# Altium PCB ASCII-gpbb-pvt1.PcbDoc (part 2 of 2)
Units mm, origin at the board's own origin, x right, y up, seen from the top; angles counter-clockwise.
Board outline 65.1 x 57.9 mm, 2 copper layers (Top Layer, Bottom Layer); 52 components, 106 nets, 1112 pads, 130 vias.
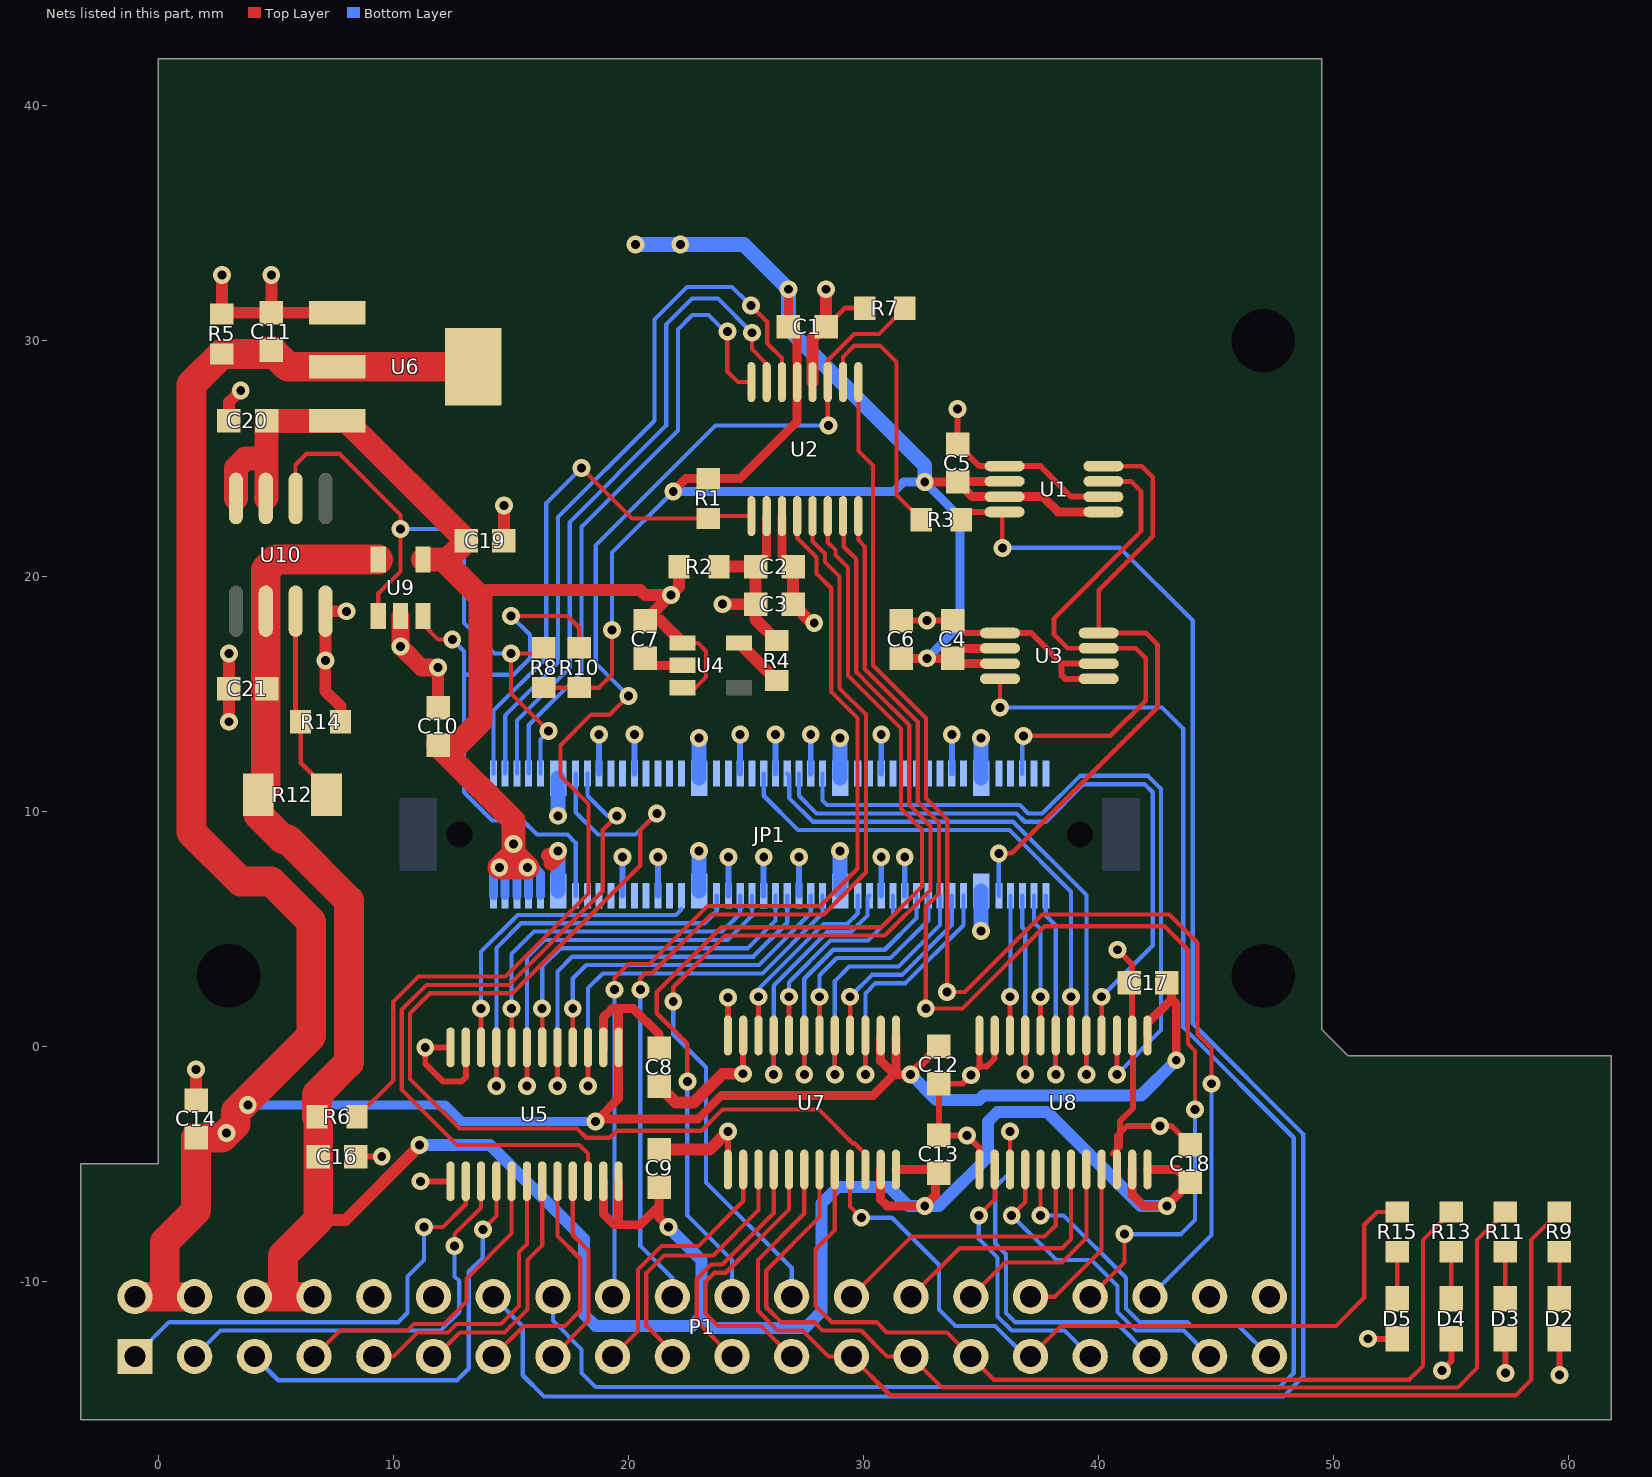
[diagram p2: the nets of this part, all layers, seen from the top]

## Via types
v1: diameter 0.762, hole 0.381, Top Layer to Bottom Layer, tented top, 102 vias
v2: diameter 0.762, hole 0.381, Top Layer to Bottom Layer, tented bottom, 28 vias

## Nets (pads, with @x,y where several pads share a name; then routed paths per layer and width w, separated by ;. In a path a pad name is that pad's centre, name@x,y a point inside that pad or via, vN(x,y) a via of type N, cw(c..) or ccw(c..) an arc to the next point about the centre after c; other vN are vias at no path point)
ADC_VA: C2.1 C3.1 R2.1 R4.1 U2.2 | length 8.8
  Top Layer w0.381: C2.1@25.4,20.4 25.875,20.875 U2.2@25.875,22.55
  Top Layer w0.508: R2.1@23.85,20.4 C2.1@25.4,20.4 C3.1@25.4,18.8 ; v1(24,18.8) C3.1@25.4,18.8 ; R4.1@26.3,17.25 25.4,18.15 C3.1@25.4,18.8
ANA_IN0: P1.18 U2.4 | length 41.9
  Top Layer w0.178: v1(19.4,2.4) 19.4,2.9 20,3.5 20.897,3.5 23.353,5.956 28.156,5.956 29.744,7.544 29.744,13.953 28.699,14.999 28.622,15.075 28.622,19.478 28,20.1 28,20.8 27.175,21.625 U2.4@27.175,22.55
  Bottom Layer w0.178: P1.18@19.32,-10.66 19.4,-10.58 v1(19.4,2.4)
ANA_IN1: P1.20 U2.5 | length 41.9
  Top Layer w0.178: v1@20.7,2.4 v1(20.5,2.4) 20.5,2.9 20.708,3.108 21.008,3.108 23.5,5.6 28.303,5.6 30.1,7.397 30.1,14.1 28.978,15.222 28.978,19.978 28.356,20.6 28.356,20.947 27.825,21.478 U2.5@27.825,22.55
  Bottom Layer w0.178: v1(20.5,2.4) 20.5,-8.5 21.86,-9.86 P1.20@21.86,-10.66
ANA_IN2: P1.22 U2.6 | length 44.9
  Top Layer w0.178: v1(22.5,-1.5) 22.5,0.1 21.2,1.4 21.2,2.306 23.95,5.056 30.753,5.056 32.489,6.792 32.489,9.205 31.589,10.105 31.589,13.505 29.333,15.761 29.333,20.367 28.8,20.9 28.8,21.1 28.475,21.425 U2.6@28.475,22.55
  Bottom Layer w0.178: v1(22.5,-1.5) 22.5,-7.2 24.4,-9.1 P1.22@24.4,-10.66
ANA_IN3: P1.24 U2.7 | length 45.4
  Top Layer w0.178: v1(21.9,1.9) 21.9,2.503 24.097,4.7 30.9,4.7 32.844,6.644 32.844,9.353 31.944,10.253 31.944,13.653 30.299,15.299 29.689,15.908 29.689,20.711 29.156,21.244 29.156,22.519 U2.7@29.125,22.55
  Bottom Layer w0.178: v1(21.9,1.9) 21.9,0.5 23.3,-0.9 23.3,-5.8 26.94,-9.44 P1.24@26.94,-10.66
ANA_IN4: P1.34 U2.8 | length 53.8
  Top Layer w0.178: U2.8@29.775,22.55 29.775,21.525 30.044,21.256 30.044,16.056 32.3,13.8 32.3,10.4 33.2,9.5 33.2,6.497 32.644,5.942 v1(32.644,1.6) 34.2,1.6 37.7,5.1 42.8,5.1 43.8,4.1 43.8,0.1 44.1,-0.2 v1(44.1,-2.7) ; P1.34@39.64,-10.66 41.1,-9.2 v1(41.1,-8)
  Bottom Layer w0.178: v1(41.1,-8) 43.5,-8 44.1,-7.4 v1(44.1,-2.7)
ANA_IN5: P1.36 U2.9 | length 56.3
  Top Layer w0.178: U2.9@29.775,28.25 29.775,25.325 30.4,24.7 30.4,16.203 32.656,13.947 32.656,10.547 33.556,9.647 v1(33.556,2.3) ; v1@33.656,2.3 34.3,2.3 37.6,5.6 43,5.6 44.2,4.4 44.2,0.5 44.8,-0.1 v1(44.8,-1.6)
  Bottom Layer w0.178: P1.36@42.18,-10.66 44.8,-8.04 v1(44.8,-1.6)
ANA_IN6: R3.1 U2.10 | length 11
  Top Layer w0.178: U2.10@29.125,28.25 29.125,29.325 29.6,29.8 30.7,29.8 31.4,29.1 31.4,23.45 R3.1@32.45,22.4
ANA_IN7: R6.1 R7.1 U2.11 | length 52.3
  Top Layer w0.178: R6.1@8.45,-3 9.991,-1.459 9.991,1.891 11.059,2.959 14.759,2.959 18.3,6.5 18.3,10.3 17.1,11.5 17.1,12.8 18.4,14.1 19.2,14.1 v1(20,14.9) ; v1(28.5,26.4) 28.475,26.425 U2.11@28.475,28.25 28.475,29.175 29.6,30.3 30.65,30.3 R7.1@31.75,31.4
  Bottom Layer w0.178: v1(20,14.9) 18.6,16.3 18.6,21.3 23.7,26.4 v1(28.5,26.4)
DAC_A: P1.14 R3.2 U1.8 | length 84.7
  Top Layer w0.178: v1(35.9,21.2) U1.8@35.9,22.625
  Top Layer w0.254: R3.2@34.15,22.4 34.475,22.725 U1.8@36,22.725
  Bottom Layer w0.178: P1.14@14.24,-10.66 15.5,-11.92 15.5,-14 16.4,-14.9 47.866,-14.9 48.7,-14.066 48.7,-3.734 44,0.966 44,18.1 40.9,21.2 v1(35.9,21.2)
DAC_B: P1.16 U3.8 | length 73.3
  Top Layer w0.178: v1(35.8,14.4) U3.8@35.8,15.625
  Bottom Layer w0.178: P1.16@16.78,-10.66 16.78,-11.68 18,-12.9 18,-13.9 18.6,-14.5 47.7,-14.5 48.3,-13.9 48.3,-3.9 43.6,0.8 43.6,13.5 42.7,14.4 v1(35.8,14.4)
DDC_SCL: JP1.B3 U1.3 U3.3 | length 22.9
  Top Layer w0.2: v2(36.8,13.2) 40.5,13.2 42,14.7 42,16.5 41.575,16.925 U3.3@40,16.925 38.675,16.925 38.1,17.5 38.1,18.2 41.8,21.9 41.8,23.6 41.375,24.025 U1.3@40.2,24.025
  Bottom Layer w0.2: JP1.B3@36.75,11.6 v2@36.75,13.15
DDC_SDA: JP1.A5 U1.4 U3.4 | length 26.4
  Top Layer w0.2: v2(35.75,8.2) 36.3,8.2 42.5,14.4 42.5,17.1 42.025,17.575 U3.4@40,17.575 40,19.4 42.3,21.7 42.3,24.2 41.825,24.675 U1.4@40.2,24.675
  Bottom Layer w0.2: JP1.A5@35.75,6.4 v2(35.75,8.2)
DUT_F_DX0: P1.39 U8.17 | length 14.9
  Top Layer w0.178: v1(37.525,-7.2) U8.17@37.525,-5.25
  Bottom Layer w0.178: v1(37.525,-7.2) 38.5,-7.2 41.156,-9.856 41.156,-11.156 41.744,-11.744 43.767,-11.744 43.923,-11.9 45.96,-11.9 P1.39@47.26,-13.2
DUT_F_DX1: P1.27 R11.2 U7.19 | length 45.9
  Top Layer w0.178: U7.19@28.125,-5.25 28.125,-7.275 25.856,-9.544 25.856,-11.11 26.49,-11.744 27.9,-11.744 28.256,-12.1 29.9,-12.1 31,-13.2 P1.27@32.02,-13.2 33.342,-14.522 55.279,-14.522 56.1,-13.7 56.1,-8.25 R11.2@57.3,-7.05
DUT_F_DX2: P1.35 U8.15 | length 16.7
  Top Layer w0.178: U8.15@36.225,-5.25 v1(36.225,-3.625)
  Bottom Layer w0.178: v1(36.225,-3.625) 36.225,-5.375 35.6,-6 35.6,-8.397 36.056,-8.853 36.056,-11.353 36.447,-11.744 40.724,-11.744 P1.35@42.18,-13.2
DUT_F_DX3: P1.37 U8.16 | length 13.7
  Top Layer w0.178: v1(36.3,-7.2) 36.875,-6.625 U8.16@36.875,-5.25
  Bottom Layer w0.178: v1(36.3,-7.2) 38.2,-9.1 39.7,-9.1 40.8,-10.2 40.8,-11.317 41.583,-12.1 43.62,-12.1 P1.37@44.72,-13.2
DUT_F_DX11: P1.33 U8.14 | length 11.5
  Top Layer w0.178: v1(34.9,-7.2) 35.575,-6.525 U8.14@35.575,-5.25
  Bottom Layer w0.178: v1(34.9,-7.2) 34.9,-8.2 35.7,-9 35.7,-11.5 36.3,-12.1 38.54,-12.1 P1.33@39.64,-13.2
DUT_F_DX14: P1.3 U5.15 | length 18.1
  Top Layer w0.178: v1(12.6,-8.5) 12.6,-8 13.725,-6.875 U5.15@13.725,-5.75
  Bottom Layer w0.178: P1.3@1.54,-13.2 2.64,-12.1 12,-12.1 12.8,-11.3 12.8,-10 12.6,-9.8 v1(12.6,-8.5)
DUT_F_DX17: P1.21 U7.16 | length 10.2
  Top Layer w0.178: P1.21@24.4,-13.2 22.9,-11.7 22.9,-9.9 23.512,-9.288 23.987,-9.288 26.175,-7.1 U7.16@26.175,-5.25
DUT_F_DX18: P1.32 U8.21 | length 7.3
  Top Layer w0.178: P1.32@37.1,-10.66 38.14,-10.66 40.125,-8.675 U8.21@40.125,-5.25
DUT_F_LVDS0_N: P1.9 U5.18 | length 12.5
  Top Layer w0.178: P1.9@9.16,-13.2 10,-13.2 11.017,-12.183 12.317,-12.183 12.672,-11.828 14.569,-11.828 15.344,-11.053 15.344,-8.756 15.675,-8.425 U5.18@15.675,-5.75
DUT_F_LVDS0_P: P1.11 U5.19 | length 10.5
  Top Layer w0.178: P1.11@11.7,-13.2 11.803,-13.2 12.82,-12.183 14.717,-12.183 15.7,-11.2 15.7,-9.1 16.325,-8.475 U5.19@16.325,-5.75
DUT_F_LVDS4_P: P1.1 U5.14 | length 19.5
  Top Layer w0.178: v1(11.3,-7.7) 12.1,-7.7 13.075,-6.725 U5.14@13.075,-5.75
  Bottom Layer w0.178: P1.1@-1,-13.2 0.456,-11.744 10.2,-11.744 10.6,-11.344 10.6,-9.8 11.3,-9.1 v1(11.3,-7.7)
DUT_F_LVDS9_P: P1.26 U8.18 | length 12.3
  Top Layer w0.178: P1.26@29.48,-10.66 32.04,-8.1 37.7,-8.1 38.175,-7.625 U8.18@38.175,-5.25
DUT_F_LVDS11_N: P1.29 R13.2 U7.20 | length 40.6
  Top Layer w0.178: U7.20@28.775,-5.25 28.775,-7.825 27.957,-8.643 27.957,-11.057 28.644,-11.744 30.544,-11.744 30.983,-12.183 33.543,-12.183 P1.29@34.56,-13.2 35.551,-14.191 53.209,-14.191 53.8,-13.6 53.8,-8.25 R13.2@55,-7.05
DUT_F_LVDS11_P: P1.31 R15.2 U7.21 | length 33
  Top Layer w0.178: U7.21@29.425,-5.25 29.425,-6.825 v1(29.9,-7.3) ; P1.31@37.1,-13.2 38.4,-11.9 50.1,-11.9 51.3,-10.7 51.3,-7.6 51.85,-7.05 R15.2@52.7,-7.05
  Bottom Layer w0.178: v1(29.9,-7.3) 31.2,-7.3 33.2,-9.3 33.2,-11.2 33.9,-11.9 35.597,-11.9 36.897,-13.2 P1.31@37.1,-13.2
DUT_F_LVDS15_N: P1.13 U5.20 | length 10.4
  Top Layer w0.178: P1.13@14.24,-13.2 15.54,-11.9 17.3,-11.9 17.944,-11.256 17.944,-9.044 16.975,-8.075 U5.20@16.975,-5.75
DUT_F_LVDS15_P: P1.15 U5.21 | length 8.4
  Top Layer w0.178: P1.15@16.78,-13.2 18.3,-11.68 18.3,-8.7 17.625,-8.025 U5.21@17.625,-5.75
DUT_F_LVDS_CK0_N: P1.28 U8.19 | length 10.8
  Top Layer w0.178: P1.28@32.02,-10.66 34.08,-8.6 38.44,-8.6 38.825,-8.215 U8.19@38.825,-5.25
DUT_F_LVDS_CK0_P: P1.30 U8.20 | length 8.9
  Top Layer w0.178: P1.30@34.56,-10.66 36.02,-9.2 38.44,-9.2 39.475,-8.165 U8.20@39.475,-5.25
DUT_F_LVDS_CK1_N: P1.5 U5.16 | length 18.2
  Top Layer w0.178: v1(13.8,-7.8) 14.375,-7.225 U5.16@14.375,-5.75
  Bottom Layer w0.178: P1.5@4.08,-13.2 5.097,-14.217 12.7,-14.217 13.2,-13.717 13.2,-9.6 13.8,-9 v1(13.8,-7.8)
DUT_F_LVDS_CK1_P: P1.7 U5.17 | length 13.4
  Top Layer w0.178: P1.7@6.62,-13.2 7.72,-12.1 10.597,-12.1 10.869,-11.828 12.144,-11.828 13.1,-10.872 13.1,-9.9 15.025,-7.975 U5.17@15.025,-5.75
DUT_F_LVDSB_N: P1.19 U7.15 | length 11.7
  Top Layer w0.178: P1.19@21.86,-13.2 21.96,-13.1 20.756,-11.896 20.756,-9.647 21.501,-8.901 23.601,-8.901 25.525,-6.978 U7.15@25.525,-5.25
DUT_F_LVDSB_P: P1.17 U7.14 | length 11.2
  Top Layer w0.178: P1.17@19.32,-13.2 20.4,-12.12 20.4,-9.5 21.4,-8.5 22.975,-8.5 24.875,-6.6 U7.14@24.875,-5.25
DUT_F_LVDSC_N: P1.25 R9.2 U7.18 | length 49.1
  Top Layer w0.178: U7.18@27.475,-5.25 27.475,-7.125 25.5,-9.1 25.5,-11.257 26.343,-12.1 27.4,-12.1 28.5,-13.2 P1.25@29.48,-13.2 31.132,-14.852 57.748,-14.852 58.4,-14.2 58.4,-8.25 R9.2@59.6,-7.05
DUT_F_LVDSC_P: P1.23 U7.17 | length 12.3
  Top Layer w0.178: U7.17@26.825,-5.25 26.825,-6.953 24.135,-9.643 23.66,-9.643 23.256,-10.047 23.256,-11.356 23.8,-11.9 25.64,-11.9 P1.23@26.94,-13.2
F_DX0: JP1.A1 U8.7 | length 9.4
  Top Layer w0.2: v1(38.175,-1.2) U8.7@38.175,0.45
  Bottom Layer w0.178: JP1.A1@37.75,6.4 37.75,5.55 38.175,5.125 v1(38.175,-1.2)
F_DX1: JP1.A8 U7.5 | length 12.3
  Top Layer w0.2: v1(28.775,-1.2) U7.5@28.775,0.45
  Bottom Layer w0.178: v1(28.775,-1.2) 28.775,2.775 29.389,3.389 31.489,3.389 33.25,5.15 JP1.A8@33.25,6.4
F_DX2: JP1.A3 U8.9 | length 9.3
  Top Layer w0.2: v1(36.875,-1.2) U8.9@36.875,0.45
  Bottom Layer w0.178: JP1.A3@36.75,6.4 36.75,5.05 36.875,4.925 v1(36.875,-1.2)
F_DX3: JP1.A2 U8.8 | length 6.1
  Top Layer w0.2: U8.8@37.525,0.45 v1(37.525,2.1)
  Bottom Layer w0.178: JP1.A2@37.25,6.4 37.25,5.25 37.525,4.975 v1(37.525,2.1)
F_DX4: JP1.B2
F_DX5: JP1.B1
F_DX6: JP1.B39 U2.14 | length 30.9
  Top Layer w0.178: v1(25.2,31.5) 25.9,30.8 25.9,29.9 26.525,29.275 U2.14@26.525,28.25
  Bottom Layer w0.178: JP1.B39@14.75,11.6 14.75,14.064 17,16.314 17,22.507 21.1,26.607 21.1,30.907 22.493,32.3 24.4,32.3 25.054,31.646 v1@25.054,31.254
F_DX7: JP1.B37 U2.16 | length 27.2
  Top Layer w0.178: v1(24.2,30.4) 24.2,28.7 24.65,28.25 U2.16@25.225,28.25
  Bottom Layer w0.178: JP1.B37@15.75,11.6 15.75,13.65 18,15.9 18,22.093 22.1,26.193 22.1,30.493 22.707,31.1 23.4,31.1 23.954,30.546 v1@24.346,30.546
F_DX8: JP1.B6
F_DX11: JP1.A4 U8.10 | length 5.9
  Top Layer w0.2: U8.10@36.225,0.45 v1(36.225,2.1)
  Bottom Layer w0.178: v1@36.25,2.125 JP1.A4@36.25,6.4
F_DX12: JP1.B38 U2.15 | length 28.8
  Top Layer w0.178: v1(25.25,30.35) 25.25,29.65 25.875,29.025 U2.15@25.875,28.25
  Bottom Layer w0.178: JP1.B38@15.25,11.6 15.25,13.857 17.5,16.107 17.5,22.3 21.6,26.4 21.6,30.7 22.7,31.8 23.8,31.8 v1(25.25,30.35)
F_DX13: JP1.B40 R1.2 U2.1 | length 22.8
  Top Layer w0.178: v1(18,24.6) 20.15,22.45 R1.2@23.4,22.45 23.5,22.55 U2.1@25.225,22.55
  Bottom Layer w0.178: JP1.B40@14.25,11.6 14.25,14.271 16.5,16.521 16.5,23.1 v1(18,24.6) v1@18.05,24.65
F_DX14: JP1.A25 U5.9 | length 18.2
  Top Layer w0.2: v1(14.375,-1.7) U5.9@14.375,-0.05
  Bottom Layer w0.178: v1(14.375,-1.7) 14.375,4.172 15.431,5.228 23.228,5.228 23.75,5.75 JP1.A25@23.75,6.4
F_DX15: JP1.B36 R8.1 U9.1 U10.2 | length 28
  Top Layer w0.178: U10.2@5.835,23.3 5.835,24.735 6.3,25.2 7.7,25.2 10.3,22.6 v1(10.3,22) 10.3,20.2 9.35,19.25 U9.1@9.35,18.3 ; R8.1@16.4,16.95 16.15,16.7 v1(15,16.7) 15,15 v1(16.6,13.4)
  Bottom Layer w0.178: v1(10.3,22) 12.1,22 13,21.1 13,18 14.3,16.7 v1(15,16.7) ; JP1.B36@16.25,11.6 16.25,13.05 v1(16.6,13.4)
F_DX16: JP1.B10
F_DX17: JP1.A12 U7.8 | length 8.7
  Top Layer w0.2: U7.8@26.825,0.45 v1(26.825,2.1)
  Bottom Layer w0.178: v1(26.825,2.1) 26.825,2.719 28.595,4.489 30.189,4.489 31.25,5.55 JP1.A12@31.25,6.4
F_DX18: JP1.B16 U8.3 | length 31.3
  Top Layer w0.2: v1(40.775,-1.2) U8.3@40.775,0.45
  Bottom Layer w0.178: JP1.B16@28.25,11.6 28.25,10.45 28.444,10.256 36.647,10.256 37.003,9.9 37.6,9.9 39.2,11.5 42.103,11.5 42.656,10.947 42.656,0.681 v1(40.775,-1.2)
F_LVDS0_N: JP1.A20 U5.6 | length 15.2
  Top Layer w0.2: U5.6@16.325,-0.05 v1(16.325,1.6)
  Bottom Layer w0.178: v1(16.325,1.6) 16.325,3.386 17.1,4.161 25.061,4.161 26.25,5.35 JP1.A20@26.25,6.4
F_LVDS0_P: JP1.A19 U5.5 | length 18.3
  Top Layer w0.2: v1(16.975,-1.7) U5.5@16.975,-0.05
  Bottom Layer w0.178: v1(16.975,-1.7) 16.975,3.175 17.605,3.805 25.305,3.805 26.75,5.25 JP1.A19@26.75,6.4
F_LVDS1_N: JP1.A30
F_LVDS1_P: JP1.A29
F_LVDS2_N: JP1.A32
F_LVDS2_P: JP1.A33
F_LVDS3_N: JP1.B31
F_LVDS3_P: JP1.B32
F_LVDS4_N: JP1.A27
F_LVDS4_P: JP1.A26 U5.10 | length 13.3
  Top Layer w0.2: U5.10@13.725,-0.05 v1(13.725,1.6)
  Bottom Layer w0.178: v1(13.725,1.6) 13.725,4.025 15.283,5.583 22.01,5.583 22.25,5.823
F_LVDS5_N: JP1.B27
F_LVDS5_P: JP1.B26
F_LVDS6_N: JP1.B28
F_LVDS6_P: JP1.B29
F_LVDS7_N: JP1.B35 U7.22 | length 45.9
  Top Layer w0.178: v2(21.2,9.9) 20.5,9.2 20.5,7.694 15.053,2.248 11.551,2.248 10.702,1.399 10.702,-1.402 12.8,-3.5 17.8,-3.5 18.2,-3.9 19.2,-3.9 19.5,-3.6 23.1,-3.6 24,-2.7 28.1,-2.7 29.533,-4.133 29.608,-4.133 30.075,-4.6 U7.22@30.075,-5.25
  Bottom Layer w0.178: JP1.B35@17.75,11.6 17.75,9.95 18.7,9 20.3,9 v2(21.2,9.9)
F_LVDS7_P: JP1.B34 U5.22 | length 30.3
  Top Layer w0.178: U5.22@18.275,-5.75 18.275,-4.575 17.9,-4.2 12.7,-4.2 10.347,-1.847 10.347,1.547 11.403,2.603 14.906,2.603 18.9,6.597 18.9,9.2 v2(19.5,9.8)
  Bottom Layer w0.178: JP1.B34@18.25,11.6 18.25,10.65 19.1,9.8 v2(19.5,9.8)
F_LVDS8_N: JP1.B25
F_LVDS8_P: JP1.B24
F_LVDS9_N: JP1.B22
F_LVDS9_P: JP1.B21 U8.6 | length 21.8
  Top Layer w0.2: U8.6@38.825,0.45 v1(38.825,2.1)
  Bottom Layer w0.178: JP1.B21@25.75,11.6 25.75,10.65 27.211,9.189 36.205,9.189 38.825,6.569 v1(38.825,2.1)
F_LVDS10_N: JP1.B15
F_LVDS10_P: JP1.B14
F_LVDS11_N: JP1.A7 U7.4 | length 8.5
  Top Layer w0.2: U7.4@29.425,0.45 v1(29.425,2.1)
  Bottom Layer w0.178: v1(29.425,2.1) 30.358,3.033 31.636,3.033 33.75,5.147 JP1.A7@33.75,6.4
F_LVDS11_P: JP1.A6 U7.3 | length 11.7
  Top Layer w0.2: v1(30.075,-1.2) U7.3@30.075,0.45
  Bottom Layer w0.178: v1(30.075,-1.2) 30.075,2.247 30.505,2.678 31.783,2.678 34.25,5.144 JP1.A6@34.25,6.4
F_LVDS12_N: JP1.B12
F_LVDS12_P: JP1.B11
F_LVDS13_N: JP1.B9
F_LVDS13_P: JP1.B8
F_LVDS14_N: JP1.B5
F_LVDS14_P: JP1.B4
F_LVDS15_N: JP1.A17 U5.4 | length 14.9
  Top Layer w0.2: U5.4@17.625,-0.05 v1(17.625,1.6)
  Bottom Layer w0.178: v1(17.625,1.6) 17.625,2.875 18.2,3.45 25.544,3.45 27.75,5.656 JP1.A17@27.75,6.4
F_LVDS15_P: JP1.A16 U5.3 | length 17.9
  Top Layer w0.2: v1(18.275,-1.7) U5.3@18.275,-0.05
  Bottom Layer w0.178: v1(18.275,-1.7) 18.275,2.469 18.9,3.094 25.691,3.094 28.153,5.556 28.158,5.556 28.25,5.647 JP1.A16@28.25,6.4
F_LVDS_CK0_N: JP1.B19 U8.5 | length 24.7
  Top Layer w0.2: v1(39.475,-1.2) U8.5@39.475,0.45
  Bottom Layer w0.178: JP1.B19@26.75,11.6 26.833,11.517 26.833,10.564 27.853,9.544 36.353,9.544 39.475,6.422 v1(39.475,-1.2)
F_LVDS_CK0_P: JP1.B18 U8.4 | length 28.5
  Top Layer w0.2: U8.4@40.125,0.45 v1(40.125,2.1)
  Bottom Layer w0.178: JP1.B18@27.25,11.6 27.25,10.65 28,9.9 36.5,9.9 36.856,9.544 37.747,9.544 39.347,11.144 41.956,11.144 42.3,10.8 42.3,4.275 v1(40.125,2.1)
F_LVDS_CK1_N: JP1.A23 U5.8 | length 15.2
  Top Layer w0.2: U5.8@15.025,-0.05 v1(15.025,1.6)
  Bottom Layer w0.178: v1(15.025,1.6) 15.025,3.925 15.972,4.872 23.972,4.872 24.75,5.65 JP1.A23@24.75,6.4
F_LVDS_CK1_P: JP1.A22 U5.7 | length 18.3
  Top Layer w0.2: v1(15.675,-1.7) U5.7@15.675,-0.05
  Bottom Layer w0.178: v1(15.675,-1.7) 15.675,3.775 16.416,4.516 24.216,4.516 25.25,5.55 JP1.A22@25.25,6.4
F_LVDSA_N: JP1.A35 R10.1 U9.3 | length 25.6
  Top Layer w0.178: U9.3@11.25,18.3 11.25,17.95 11.9,17.3 v1(12.5,17.3) ; v1(15,18.3) 17.4,18.3 17.9,17.8 R10.1@17.9,16.95
  Bottom Layer w0.178: v1(12.5,17.3) 13,16.8 13,15.8 ; v1(15,18.3) 15.8,17.5 15.8,16.5 15.1,15.8 13,15.8 ; JP1.A35@17.75,6.4 17.75,8.65 17.4,9 16.1,9 15.5,9.6 14.2,9.6 13,10.8 13,15.8
F_LVDSA_P: JP1.A34
F_LVDSB_N: JP1.A14 U7.9 | length 11.5
  Top Layer w0.2: v1(26.175,-1.2) U7.9@26.175,0.45
  Bottom Layer w0.178: v1(26.175,-1.2) 26.175,2.572 28.447,4.844 29.447,4.844 30.167,5.564 30.167,6.317 JP1.A14@30.25,6.4
F_LVDSB_P: JP1.A15 U7.10 | length 8.3
  Top Layer w0.2: U7.10@25.525,0.45 v1(25.525,2.1)
  Bottom Layer w0.178: v1(25.525,2.1) 25.525,2.425 28.3,5.2 29.3,5.2 29.75,5.65 JP1.A15@29.75,6.4
F_LVDSC_N: JP1.A9 U7.6 | length 9.2
  Top Layer w0.2: U7.6@28.125,0.45 v1(28.125,2.1)
  Bottom Layer w0.178: v1(28.125,2.1) 28.125,3.013 28.856,3.744 31.144,3.744 32.75,5.35 JP1.A9@32.75,6.4
F_LVDSC_P: JP1.A10 U7.7 | length 12.5
  Top Layer w0.2: v1(27.475,-1.2) U7.7@27.475,0.45
  Bottom Layer w0.178: v1(27.475,-1.2) 27.475,2.866 28.709,4.1 30.9,4.1 32.25,5.45 JP1.A10@32.25,6.4
GND: C1.2 C2.2 C3.2 C4.2 C5.2 C6.2 C7.2 C8.2 C9.2 C10.2 C11.2 C12.2 C13.2 C14.2 C16.2 C17.2 C18.2 C19.2 C20.2 C21.2 D2.2 D3.2 D4.2 D5.2 JP1.A11 JP1.A13 JP1.A18 JP1.A21 JP1.A24 JP1.A28 JP1.A31 JP1.B7 JP1.B13 JP1.B17 JP1.B20 JP1.B23 JP1.B30 JP1.B33 JP1.GND1 JP1.GND2 JP1.GND3 JP1.GND4 JP1.GND5 JP1.GND6 JP1.GND7 JP1.GND8 P1.10 P1.12 P1.38 P1.40 R5.2 R7.2 R14.1 U1.2 U1.5 U2.3 U2.12 U3.1 U3.2 U3.5 U4.2 U5.11 U5.12 U5.13 U6.1 U7.11 U7.12 U7.13 U8.2 U8.11 U8.12 U8.13 U8.22 U9.2 U10.8 | length 146.3
  Top Layer w0.2: C1.2@28.4,30.6 29.2,31.4 R7.2@30.05,31.4
  Top Layer w0.254: C16.2@8.4,-4.7 v1(9.5,-4.7) ; v1(11.15,-5.75) U5.13@12.425,-5.75 ; U5.12@12.425,-0.05 v1(11.35,-0.05) 11.35,-0.75 12.1,-1.5 12.9,-1.5 13.075,-1.325 U5.11@13.075,-0.05 ; U7.13@24.225,-5.25 v1(24.225,-3.625) ; U7.12@24.225,0.45 v1(24.225,2.075) ; v1(24.875,-1.175) U7.11@24.875,0.45 ; C6.2@31.9,18.1 C4.2@33.8,18.1 34.325,17.575 U3.5@35.8,17.575 37.125,17.575 38.425,16.275 ; v1(34,27.1) C5.2@34,25.6 34.925,24.675 U1.5@36,24.675 37.525,24.675 38.825,23.375 U1.2@40.2,23.375 ; U8.13@34.925,-5.25 34.925,-4.325 v1(34.4,-3.8) C13.2@33.2,-3.8 C12.2@33.2,-1.6 34.2,-1.6 34.925,-0.875 ; U8.12@34.925,0.45 34.925,-0.875 ; U8.11@35.575,0.45 35.575,-0.525 35.225,-0.875 34.925,-0.875 ; U3.1@40,15.625 38.575,15.625 38.425,15.775 38.425,16.275 ; U3.2@40,16.275 38.425,16.275 ; U8.22@40.605,-4.575 U8.22@40.775,-4.405 ; U8.22@40.775,-5.25 U8.22@40.775,-4.405 ; v1(40.8,4.1) 41.425,3.475 U8.2@41.425,0.45 41.461,0.414 41.461,-2.639 40.9,-3.2 40.9,-3.7 ; C18.2@43.9,-4.2 43.1,-3.4 v1(42.6,-3.4) 41.2,-3.4 40.9,-3.7 ; v1(51.45,-12.45) D5.2@52.7,-12.45 ; v1(54.6,-13.8) 55,-13.4 D4.2@55,-12.45 ; v1@57.3,-13.7 D3.2@57.3,-12.45 ; v1(59.6,-14) D2.2@59.6,-12.45 ; U8.22@40.775,-4.405 40.775,-3.825 40.9,-3.7 ; U8.22@40.775,-4.405 40.9,-4.28 40.9,-3.7
  Top Layer w0.381: C7.2@21,16.2 U4.2@22.3,16.2 ; U2.3@26.525,22.55 26.525,20.875 C2.2@27,20.4
  Top Layer w0.5: v1(3,13.8) v1(3,16.7) ; C20.2@3,26.6 3,27.4 v1(3.5,27.9) ; R14.1@7.75,13.8 7.75,14.45 7.1,15.1 7.1,16.4 v1(7.105,16.405) U10.8@7.105,18.5 v1(8,18.5) ; C19.2@14.7,21.5 v1(14.7,23)
  Top Layer w0.508: C14.2@1.6,-2.3 v1(1.6,-1) ; v1(2.7,32.8) R5.2@2.7,31.15 2.75,31.2 U6.1@7.6,31.2 ; C11.2@4.8,31.2 v1(4.8,32.8) ; C10.2@11.9,14.4 v1(11.9,16.1) ; C9.2@21.3,-4.4 23.45,-4.4 v1(24.225,-3.625) ; C8.2@21.3,-1.7 22,-2.4 22.773,-2.4 23.998,-1.175 v1(24.875,-1.175) ; C2.2@27,20.4 C3.2@27,18.8 27.8,18 v1(27.9,18) ; U2.12@27.825,28.25 27.825,30.125 C1.2@28.3,30.6 ; C1.2@28.4,30.6 v1(28.4,32.2)
  Top Layer w0.635: 16.6,8.119 16.819,8.119 v2(17,8.3) 17,8.076 16.703,7.779
  Top Layer w0.762: U9.2@10.3,18.3 v1(10.3,17) 11.2,16.1 v1(11.9,16.1)
  Bottom Layer w0.254: JP1.B33@18.75,11.6 v2(18.75,13.25) ; JP1.A31@19.75,6.4 v2(19.75,8.05) ; JP1.B30@20.25,11.6 v2(20.25,13.25) ; JP1.A28@21.25,6.4 v2(21.25,8.05) ; JP1.A24@24.25,6.4 v2(24.25,8.05) ; JP1.B23@24.75,11.6 v2(24.75,13.25) ; JP1.A21@25.75,6.4 v2(25.75,8.05) ; JP1.B20@26.25,11.6 v2(26.25,13.25) ; JP1.A18@27.25,6.4 v2(27.25,8.05) ; JP1.B17@27.75,11.6 v2(27.75,13.25) ; JP1.A13@30.75,6.4 v2(30.75,8.05) ; JP1.B13@30.75,11.6 v2(30.75,13.25) ; JP1.A11@31.75,6.4 v2(31.75,8.05) ; JP1.B7@33.75,11.6 v2(33.75,13.25)
  Bottom Layer w0.635: JP1.GND4@17,6.6 v2(17,8.3) ; v2(17,9.8) JP1.GND8@17,11.4 ; JP1.GND3@23,6.6 v2(23,8.3) ; JP1.GND7@23,11.4 v2(23,13.1) ; JP1.GND2@29,6.6 v2(29,8.3) ; JP1.GND6@29,11.4 v2(29,13.1) ; v1(35,4.9) JP1.GND1@35,6.6 ; JP1.GND5@35,11.4 v2(35,13.1)
  other v1: 57.3,-13.9 34.562,-1.238 32.7,18.1
NetD2_1: D2.1 R9.1 | length 2
  Top Layer w0.178: D2.1@59.6,-10.75 R9.1@59.6,-8.75
NetD3_1: D3.1 R11.1 | length 2
  Top Layer w0.178: D3.1@57.3,-10.75 R11.1@57.3,-8.75
NetD4_1: D4.1 R13.1 | length 2
  Top Layer w0.178: D4.1@55,-10.75 R13.1@55,-8.75
NetD5_1: D5.1 R15.1 | length 2
  Top Layer w0.178: D5.1@52.7,-10.75 R15.1@52.7,-8.75
NetR4_2: R4.2 U4.5 | length 2.3
  Top Layer w0.508: U4.5@24.7,17.15 R4.2@26.3,15.55
NetR12_2: R12.2 R14.2 U10.7 | length 8.3
  Top Layer w0.203: U10.7@5.835,18.5 5.835,14.015 R14.2@6.05,13.8 6.05,12.05 7.15,10.95 R12.2@7.15,10.7
P3.3V: C1.1 C4.1 C5.1 C6.1 C8.1 C11.1 C12.1 C14.1 C17.1 P1.2 P1.4 R1.1 R5.1 R8.2 R10.2 U1.1 U1.6 U1.7 U2.13 U3.6 U3.7 U5.1 U5.2 U6.2 U6.4 U7.1 U7.2 U8.1 | length 202.3
  Top Layer w0.178: R8.2@16.4,15.25 R10.2@17.9,15.25 18.75,15.25 19.3,15.8 v1(19.3,17.7)
  Top Layer w0.381: v1(18.6,-3.2) v1@18.7,-3.1 ; U5.2@18.925,-0.05 18.925,1.225 19.3,1.6 19.6,1.6 ; C8.1@21.3,-0.1 21.3,0.5 20.2,1.6 19.6,1.6 ; v1(21.9,23.6) 22.45,24.15 R1.1@23.4,24.15 24.75,24.15 27.175,26.575 U2.13@27.175,28.25 27.175,30.125 C1.1@26.7,30.6 ; C1.1@26.8,30.6 v1(26.8,32.2) ; U7.2@30.725,0.45 30.725,-0.625 31.3,-1.2 ; U7.1@31.375,0.45 31.375,-1.125 31.3,-1.2 ; C6.1@31.9,16.5 C4.1@33.8,16.5 ; v1(32.6,24) C5.1@34,24 ; C12.1@33.2,0 v1(32,-1.2) 31.3,-1.2 ; U3.7@35.8,16.275 34.025,16.275 C4.1@33.8,16.5 ; U3.6@35.8,16.925 34.225,16.925 C4.1@33.8,16.5 ; U1.6@36,24.025 34.025,24.025 C5.1@34,24 ; U1.1@40.2,22.725 38.275,22.725 37.625,23.375 U1.7@36,23.375 34.625,23.375 C5.1@34,24 ; U8.1@42.075,0.45 42.075,0.975 43.1,2 ; C17.1@43.1,2.7 43.1,2 ; v1(43.3,-0.6) 43.3,1.8 43.1,2 ; v1@18.7,-3.1 19.575,-2.225 U5.1@19.575,-0.05 19.575,1.575 19.6,1.6 ; v1@18.7,-3.1 22.953,-3.1 23.953,-2.1 30.4,-2.1 31.3,-1.2
  Top Layer w1.27: P1.2@-1,-10.66 0.27,-10.66 ; P1.4@1.54,-10.66 0.27,-10.66 ; U6.4@13.4,28.9 U6.2@7.6,28.9 5.5,28.9 C11.1@4.8,29.6 4.65,29.45 R5.1@2.7,29.45 1.4,28.15 1.4,9.1 3.5,7 4.8,7 6.5,5.3 6.5,0.426 3.287,-2.787 3.287,-3.313 2.7,-3.9 C14.1@1.6,-3.9 1.6,-7 0.27,-8.33 0.27,-10.66
  Bottom Layer w0.178: v1(19.3,17.7) 19.3,21 v1(21.9,23.6)
  Bottom Layer w0.381: v1(2.9,-3.7) 2.9,-3.4 v1(3.8,-2.5) 12.2,-2.5 12.9,-3.2 v1(18.6,-3.2) ; v1(21.9,23.6) 31.3,23.6 31.7,24 v1(32.6,24) 34.1,22.5 34.1,17.9 v1(32.7,16.5)
  Bottom Layer w0.508: v1(32,-1.2) 33.1,-2.3 34.9,-2.3 35.1,-2.1 41.8,-2.1 v1(43.3,-0.6)
  Bottom Layer w0.635: v1(20.3,34.1) v1(22.2,34.1) 24.9,34.1 v1(26.8,32.2) 26.8,30.5 32.6,24.7 v1(32.6,24)
P5.0V_MAIN: C7.1 C10.1 C19.1 C20.1 JP1.A36 JP1.A37 JP1.A38 JP1.A39 JP1.A40 R2.2 U4.1 U4.3 U6.3 U9.4 U10.3 U10.4 | length 62.6
  Top Layer w0.178: U4.3@22.3,15.25 22.85,15.25 23.3,15.7 23.3,16.8 22.95,17.15 U4.1@22.3,17.15
  Top Layer w0.508: 13.7,19.1 14,19.4 20.5,19.4 20.7,19.2 v1(21.8,19.2) ; R2.2@22.15,20.4 22.15,19.55 v1(21.8,19.2) ; U4.1@22.3,17.15 21.35,18.1 C7.1@20.7,18.1 v1(21.8,19.2)
  Top Layer w1.016: U10.4@3.295,23.3 3.295,24.595 3.7,25 4.6,25 ; U10.3@4.565,23.3 4.6,23.335 4.6,25 ; U9.4@11.25,20.7 12.1,20.7 ; C10.1@11.9,12.8 12.7,12.8 13.7,13.8 13.7,19.1 12.1,20.7 ; C10.1@12.05,12.65 15.1,9.6 v2(15.1,8.6) 15.1,8.2 ; 4.6,25 C20.1@4.6,26.6 U6.3@7.6,26.6 8,26.6 C19.1@13.1,21.5 12.3,20.7 12.1,20.7 ; 15.1,8.2 v2(14.5,7.6) v2(15.7,7.6) 15.1,8.2
  Bottom Layer w0.381: JP1.A40@14.25,6.4 14.25,7.35 v2(14.5,7.6) 15.2,7.6 ; JP1.A39@14.75,6.4 v2@14.75,7.55 ; v2(15.1,8.6) 15.1,7.7 15.2,7.6 ; JP1.A38@15.25,6.4 15.25,7.55 15.2,7.6 ; JP1.A37@15.75,6.4 15.75,7.55 v2(15.7,7.6) ; JP1.A36@16.25,6.4 16.25,7.35 16,7.6 v2(15.7,7.6) ; 15.2,7.6 v2(15.7,7.6)
P_DUT: C9.1 C13.1 C16.1 C18.1 C21.1 P1.6 P1.8 R6.2 R12.1 U5.23 U5.24 U7.23 U7.24 U8.23 U8.24 U9.5 U10.6 | length 119.4
  Top Layer w0.381: U5.23@18.925,-5.75 18.925,-7.125 19.4,-7.6 19.7,-7.6 ; U5.24@19.575,-5.75 19.575,-7.475 19.7,-7.6 ; C9.1@21.3,-6 21.3,-6.8 ; v1(21.7,-7.7) 21.3,-7.3 21.3,-6.8 ; U7.23@30.725,-5.25 30.725,-6.525 31,-6.8 v1(32.6,-6.8) 33.05,-6.35 33.05,-5.25 U7.24@31.375,-5.25 ; U8.23@41.425,-5.25 41.425,-6.325 41.9,-6.8 v1(42.9,-6.8) C18.1@43.9,-5.8 43.35,-5.25 U8.24@42.075,-5.25 ; 19.7,-7.6 20.5,-7.6 21.3,-6.8
  Top Layer w0.508: 6.8,-7.4 7.949,-7.4 11.1,-4.249 v1(11.1,-4.2)
  Top Layer w1.27: P1.6@4.08,-10.66 5.3,-10.66 ; P1.8@6.62,-10.66 5.3,-10.66 ; U9.5@9.35,20.7 5,20.7 4.565,20.265 U10.6@4.565,18.5 4.565,11.015 R12.1@4.25,10.7 4.25,9.85 5.3,8.8 5.5,8.8 8.1,6.2 8.1,-0.7 6.75,-2.05 R6.2@6.75,-3 6.8,-3.05 C16.1@6.8,-4.7 6.8,-7.4 5.3,-8.9 5.3,-10.66
  Bottom Layer w0.508: v1(11.1,-4.2) 14.1,-4.2 18.1,-8.2 18.1,-11.4 18.6,-11.9 22.7,-11.9 23.1,-11.5 ; v1(21.7,-7.7) 23.1,-9.1 23.1,-11.5 ; v1(42.9,-6.8) 41.8,-6.8 37.8,-2.8 35.7,-2.8 35.3,-3.2 35.3,-4.7 33.2,-6.8 v1(32.6,-6.8) 31.9,-6.8 31.1,-6 28.9,-6 28.2,-6.7 28.2,-11.3 27.5,-12 23.6,-12 23.1,-11.5
pads on no net: JP1.0 NTLOGO.0 U4.4 U10.1 U10.5

## Polygon pours and split planes (outlines as drawn)
GND on Top Layer "gnd" (solid, remove dead copper, pour order 9): -4.2,-18.2 62.3,-19.1 65.9,-11.5 52.9,41.9 50.2,44.6 -0.6,44.6 -6.6,38.6 -6.6,-12.2
P_DUT on Top Layer "gnd" (solid, remove dead copper, pour order 7): 0.9,21.8 0.918,21.818 10.802,21.818 10.802,-0.648 8.45,-3 -0.9,-3 -1.9,-2 -1.3,-1.4 -1.3,21.9
P5.0V_MAIN on Top Layer "gnd" (solid, remove dead copper, pour order 8): 1.4,27.3 16.3,27.3 21.3,32.3 21.3,18.15 21.35,18.1 -0.3,18.1 -0.7,18.5 -0.7,27.2
P3.3V on Top Layer "Top Layer-No Net" (solid, remove dead copper, pour order 6): -1.6,16.8 -1.5,26.9 16.1,26.9 21.9,32.7 50.3,32.7 51.2,44.2 27,43 -0.5,43 -3.5,40 -3.5,16
GND on Bottom Layer "gnd" (solid, remove dead copper, pour order 10): -4,-18.9 45.1,-19.6 66,-17.4 53.3,40.6 50.5,43.4 -2,43.4 -6.1,39.3 -6.1,-13

## Keep-outs
Keep-Out Layer:
  the board outline again, w1

## Silkscreen, mask and mechanical layers (free items; w line width, h text height)
Top Overlay:
  circle w0.127: c46.325,9.367 r0.583
  lines w0.2: -2.3,-11.9 0.3,-11.9 ; 9.802,34.794 ccw(c10.67,34.794) 10.67,33.927 17.93,33.927 ccw(c17.93,34.943) 18.946,34.943 18.946,39.515 ccw(c17.93,39.515) 17.93,40.531 10.818,40.531 ccw(c10.818,39.515) 9.802,39.515 9.802,34.794
  lines w0.203: 0.3,-14.47 0.3,-11.9
  text "GPBB PVT1" at 20.1,38.9 h0.76
  text "Designed in" at 20.075,37.525 h0.76
  text "Singapore" at 20.075,36.125 h0.76
  text "10/14" at 20.1,34.7 h0.76
  text "c bunnie@kosagi.com" at 46.575,9.1 h0.76 r90
  text "Apache 2.0 License" at 48.075,8.8 h0.76 r90
  text "I/O VOLTAGE" at 1.8,7.4 h0.76
  text "Sutajio Ko-Usagi Pte Ltd" at 45.1,7.4 h0.76 r90
  text "SET" at 4.7,6.2 h0.76
  text "D" at 52.4,-5.4 h0.76
  text "C" at 54.7,-5.4 h0.76
  text "B" at 57.2,-5.4 h0.76
  text "A" at 59.3,-5.4 h0.76
  text "3.3V" at -1.7,-8.8 h1
  text "PDUT" at 3.7,-8.8 h1
  text "G" at 8.9,-8.8 h1
  text "G" at 11.4,-8.8 h1
  text "G" at 44.4,-8.8 h1
  text "G" at 47,-8.8 h1
Bottom Overlay:
  text "SN:" at 48,34.6 h0.9
Top Solder:
  the board outline again, w0.2
Mechanical 3:
  circle w0.2: c-20.71,-9.64 r1.26
  circle w0.2: c3,3 r1.26
  circle w0.2: c47,3 r1.26
  circle w0.2: c47,30 r1.26
  lines w0.127: 110.102,2.624 152.012,2.624 ; 110.102,12.154 152.012,12.154 ; 112.642,3.894 113.912,2.624 115.182,3.894 ; 112.642,10.884 113.912,12.154 ; 113.912,2.75 113.912,12.154 ; 115.182,10.884 113.912,12.154 ; 119.765,13.495 121.035,14.765 ; 121.035,12.225 123.575,14.765 ; 122.305,12.225 123.575,13.495 ; 122.305,14.765 119.765,12.225 119.765,14.765 123.575,14.765 ; 123.575,12.225 123.575,14.765 ; 126.365,13.495 127.635,14.765 ; 127.635,12.225 130.175,14.765 ; 128.905,12.225 130.175,13.495 ; 128.905,14.765 126.365,12.225 126.365,14.765 130.175,14.765 ; 130.175,12.225 130.175,14.765 ; 138.104,13.477 139.374,14.747 ; 138.129,1.232 139.399,2.502 ; 138.129,2.502 138.129,-0.038 ; 139.374,12.207 141.914,14.747 ; 139.399,-0.038 141.939,2.502 141.939,-0.038 138.129,-0.038 ; 140.644,12.207 141.914,13.477 ; 140.644,14.747 138.104,12.207 138.104,14.747 141.914,14.747 ; 140.669,-0.038 141.939,1.232 ; 140.669,2.502 138.129,-0.038 ; 141.914,12.207 141.914,14.747
  lines w0.2: -20.71,-7.825 -20.71,-9.64 -19.1,-9.64 ; 0,-5 -30,-5 -30,-24.2 0,-24.2 ; 0.1,6.4 6.2,6.4 6.2,42 ; 1,3 3,3 3,0.9 ; 6.2,42.05 6.2,67.025 29.85,67.025 29.85,42 ; 12.8,9.9 12.8,9 13.7,9 ; 14.25,12.1 14.25,13.625 ; 16.4,0.7 16.4,4.3 ; 37.75,4.4 37.75,5.975 ; 38.2,9 39.2,9 39.2,10 ; 43.9,30 47,30 47,32.925 ; 47,0.975 47,3 49.025,3 ; 49.525,33.125 82.075,33.125 82.075,42 49.5,42 ; 0,-24.2 0,42 49.5,42 ; 0,-24.2 49.5,-24.2 49.5,-1.8 49.5,42 ; 6.9,1.2 6.9,5 11.4,5 11.4,1.2 6.9,1.2 ; 13.6,0.7 22.9,0.7 22.9,4.3 13.6,4.3 13.6,0.7
  text "FPGA heat zone" at 10.875,54.3 h1
  text "GPBB PVT1" at 98.672,40.094 h1
  text "Contact: bunnie@kosagi.com" at 98.672,37.554 h1
  text "cantilever" at 58.75,36.8 h1
  text "Silk: white" at 132.338,25.722 h0.76
  text "Soldermask: matte black" at 132.213,24.222 h0.76
  text "Finish: immersion gold" at 132.213,22.872 h0.76
  text "3mm backside clearance limit" at 13.6,18.9 h1
  text "Material and thickness" at 83.432,18.504 h1.27
  text "Immersion gold finish" at 98.625,16.35 h0.76
  text "Top-bottom pair" at 113.912,13.424 h0.76 r45
  text "Copper 1oz finished" at 98.85,13.3 h0.76
  text "copper" at 138.075,13.125 h0.7
  text "no components on backside" at 3.7,11.9 h1 r90
  text "FR-4: 1.6mm" at 96.575,7.125 h0.76
  text "supp power TBD" at 14.7,1.8 h0.5
  text "Copper 1oz finished" at 98.85,0.3 h0.76
  text "Immersion gold finish" at 98.925,-3.25 h0.76
  text "Mech via: 15mil hole / 30 mil pad smallest" at 91.622,-11.841 h0.76
  text "Route: 7mil/7mil smallest" at 91.622,-14.381 h0.76

## Text inside footprints (layer, text, board x,y; h text height)
NTLOGO: Top Solder "novena" at 34.12,31 h3
P1: Top Overlay "39" at 49.292,-13.708 h1.27; Top Overlay "40" at 49.292,-11.168 h1.27; Top Overlay "2" at -3.54,-11.168 h1.27; Top Overlay "1" at -3.54,-13.708 h1.27